# Altium PCB dc-1.PcbDoc
Units mm, origin at the board's own origin, x right, y up, seen from the top; angles counter-clockwise.
Board outline 15.49 x 11.94 mm, 2 copper layers (Top Layer, Bottom Layer); 5 components, 6 nets, 25 pads, 2 vias.
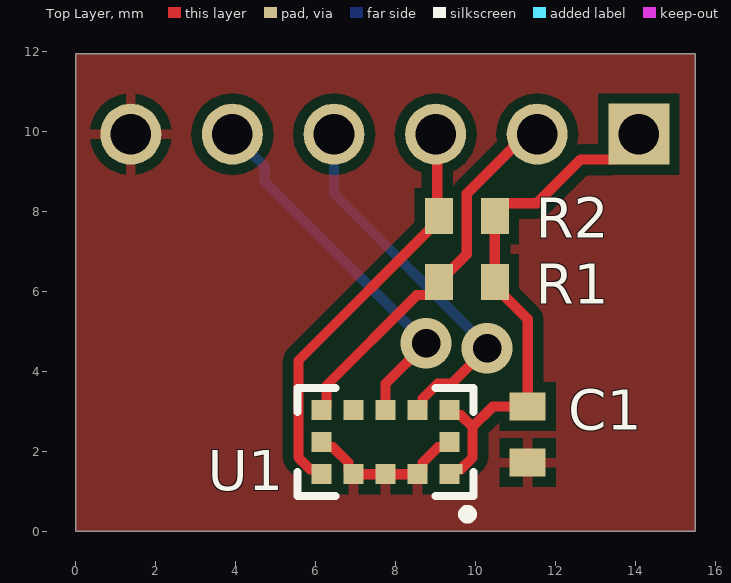
[diagram p0: Top Layer view]
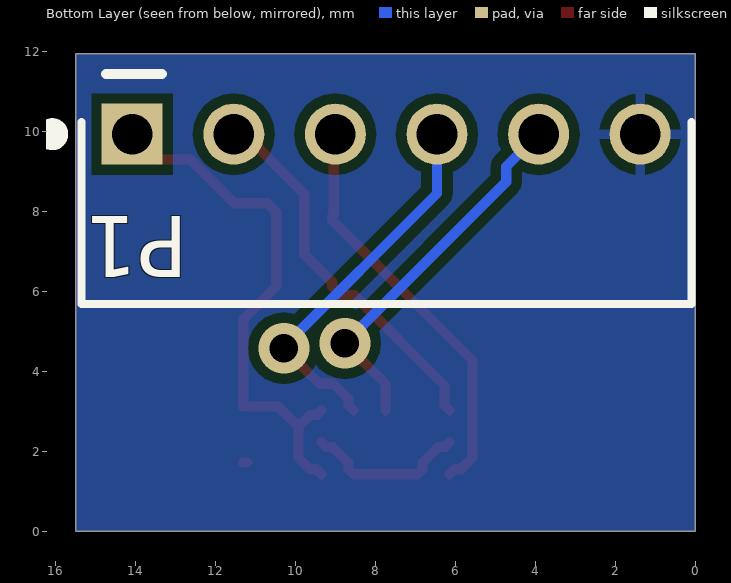
[diagram p1: Bottom Layer view, seen from below]

## Layer stack, top to bottom
Top Solder: solder mask 0.0102, Solder Resist, Dk 3.5
Top Layer: signal copper 0.0356
Dielectric 1: dielectric 0.32, FR-4, Dk 4.8
Bottom Layer: signal copper 0.0356
Bottom Solder: solder mask 0.0102, Solder Resist, Dk 3.5

## Board outline
0,0 15.494,0 15.494,11.938 0,11.938

## Design rules (kind name [scope] priority, off if disabled: settings)
Clearance [All] p1: gap=0.254 ignorepadtopadclearanceinfootprint=FALSE except(0: Arc-Hole Track-Hole SMDPad-Hole THPad-Hole Via-Hole Fill-Hole Poly-Hole Region-Hole Text-Hole; 0.2: Arc-Arc Arc-Track Arc-SMDPad Track-Track Track-SMDPad SMDPad-SMDPad)
PolygonConnect [All] p1: connectstyle=Relief reliefconductorwidth=0.254 reliefentries=4 polygonreliefangle="90 Angle" airgapwidth=0.254
RoutingVias [All] p1: holewidth=0.711 width=1.27 viastyle="Through Hole" minholewidth=0.711 minwidth=1.27 maxholewidth=0.711 maxwidth=1.27
SolderMaskExpansion [All] p1: expansion=0.102
Width [All] p1: maxlimit=0.254 minlimit=0.254 preferedwidth=0.254
30 further rules are at their usual default settings.

## Components (designator, comment, footprint, x,y, rotation, side; value= is the part's Value field where it differs from the comment)
C1 "cap_single_np" chip_0603 11.303,2.413 r270 top
P1 "conn-6x1_0" HDDR_6x1_RA 14.08,9.924 r180 bottom locked
R1 "res_single" chip_0603 9.779,6.223 r180 top
R2 "res_single" chip_0603 9.779,7.874 r180 top
U1 "VL53L0X" VL53L0X 7.747,2.222 r270 top

## Footprints (in the part's own frame and the unit in brackets; to place one, negate y for a bottom-side part, rotate by r counter-clockwise, add the part's x,y. Pads: shape width x height; smd on the part's side, far side on the other; paste and mask are expansions set on the pad)
chip_0603 [mm]
  rect 0.7x0.9 smd: 1(-0.7,0) 2(0.7,0)
  body extent -0.85,-0.45 0.85,0.45, height 0.6
HDDR_6x1_RA [mil] "Header, 6-pos, Right-Angle"
  rect 60x60 hole 40: 1(0,0)
  round 60 hole 40: 2(100,0) 3(200,0) 4(300,0) 5(400,0) 6(500,0)
  silkscreen extent -87,-167 550,12, body extent -49,-391 551,12, height 121
VL53L0X [mm]
  rect 0.25x0.1 smd mask+0.08: 1(0.675,1.875)
  rect 0.5x0.5 smd mask+0.08: 1(0.8,1.6) 2(0.8,0.8) 3(0.8,0) 4(0.8,-0.8) 5(0.8,-1.6) 6(0,-1.6) 7(-0.8,-1.6) 8(-0.8,-0.8) 9(-0.8,0) 10(-0.8,0.8) 11(-0.8,1.6) 12(0,1.6)
  silkscreen extent -1.35,-2.2 1.91,2.2, body extent -1.35,-2.2 1.35,2.2, height 1

## Part data
C1: library part CAP-00542, "CAP, 0.1uF, ±10%, 16V, X7R, 0603", Capacitance=0.1uF, Manufacturer=Murata, Tolerance=±10%, Voltage Rating=16V, Part Number=CAP-00542, Type=X7R
P1: library part CONN-00050, "Header, 6x1, 0.1\", Right-Angle", Manufacturer=Samtec, Manufacturer PN=TSW-106-08-F-S-RA, Cost=0.54, Levels=1, Part Number=CONN-00050, Positions per level=6, Type=Header
R1 R2: library part RES-00284, "RES SMD 1.5K OHM 1% 1/4W 0603", Manufacturer=Panasonic, Manufacturer PN=ERJ-PA3F1501V, Power Rating=0.25W, Resistance=1.5k, Tolerance=1%, Part Number=RES-00284
U1: library part MISC-00028, "Time-of-Flight Ranging Sensor, VL53L0X", Manufacturer=ST, Manufacturer PN=VL53L0CXV0DH/1, Cost=5.36, Part Number=MISC-00028

## Via types
v1: diameter 1.27, hole 0.711, Top Layer to Bottom Layer, 2 vias

## Nets (pads, with @x,y where several pads share a name; then routed paths per layer and width w, separated by ;. In a path a pad name is that pad's centre, name@x,y a point inside that pad or via, vN(x,y) a via of type N, cw(c..) or ccw(c..) an arc to the next point about the centre after c; other vN are vias at no path point)
GND: C1.2 P1.6 U1.2 U1.3 U1.4 U1.6 U1.12 | length 4.2
  Top Layer w0.254: U1.6 6.27,2.1 6.432,2.1 6.824,1.708 6.824,1.545 U1.4 U1.3 U1.2 8.67,1.545 8.67,1.708 9.062,2.1 9.224,2.1 U1.12 ; C1.2@11.203,1.713 C1.2
INT: P1.2 R1.2 U1.7 | length 9.5
  Top Layer w0.254: U1.7 6.27,3.145 6.27,3.643 8.527,5.9 8.856,5.9 9.079,6.123 R1.2 9.779,6.923 9.779,8.436 11.266,9.924 P1.2
SCL: P1.4 U1.10 | length 9.4
  Top Layer w0.254: U1.10 8.67,3.145 8.67,3.308 9.045,3.683 9.398,3.683 v1(10.287,4.572)
  Bottom Layer w0.254: P1.4 6.46,8.439 10.287,4.612 v1(10.287,4.572)
SDA: P1.5 U1.9 | length 9.3
  Top Layer w0.254: U1.9 7.747,3.683 v1(8.763,4.699)
  Bottom Layer w0.254: P1.5 4.728,9.115 4.728,8.734 v1(8.763,4.699)
VCC: C1.1 P1.1 R1.1 R2.1 U1.1 U1.11 | length 13.5
  Top Layer w0.254: U1.1@9.347,1.422 9.47,1.545 9.632,1.545 9.924,1.837 9.924,2.608 ; U1.11 9.47,2.899 9.632,2.899 9.924,2.608 ; P1.1 13.445,9.289 12.619,9.289 11.528,8.197 10.702,8.197 10.479,7.974 R2.1 R1.1 10.479,6.123 11.303,5.299 C1.1 10.429,3.113 9.924,2.608
XS: P1.3 R2.2 U1.5 | length 10.3
  Top Layer w0.254: U1.5 6.024,1.545 5.862,1.545 5.57,1.837 5.57,4.265 9.079,7.774 R2.2 9.039,7.914 9.039,9.884 P1.3
pads on no net: U1.8

## Polygon pours and split planes (outlines as drawn)
GND on Bottom Layer (solid, pour order 0): 0,11.938 0,0 15.494,0 15.494,11.938
GND on Top Layer (solid, pour order 2): 0,0 15.494,0 15.494,11.938 0,11.938

## Silkscreen, mask and mechanical layers (free items; w line width, h text height)
Bottom Overlay:
  lines w0.254: 13.335,11.43 14.732,11.43